# EAGLE board LIC_V-00237-01 (EAGLE 7.2.0)
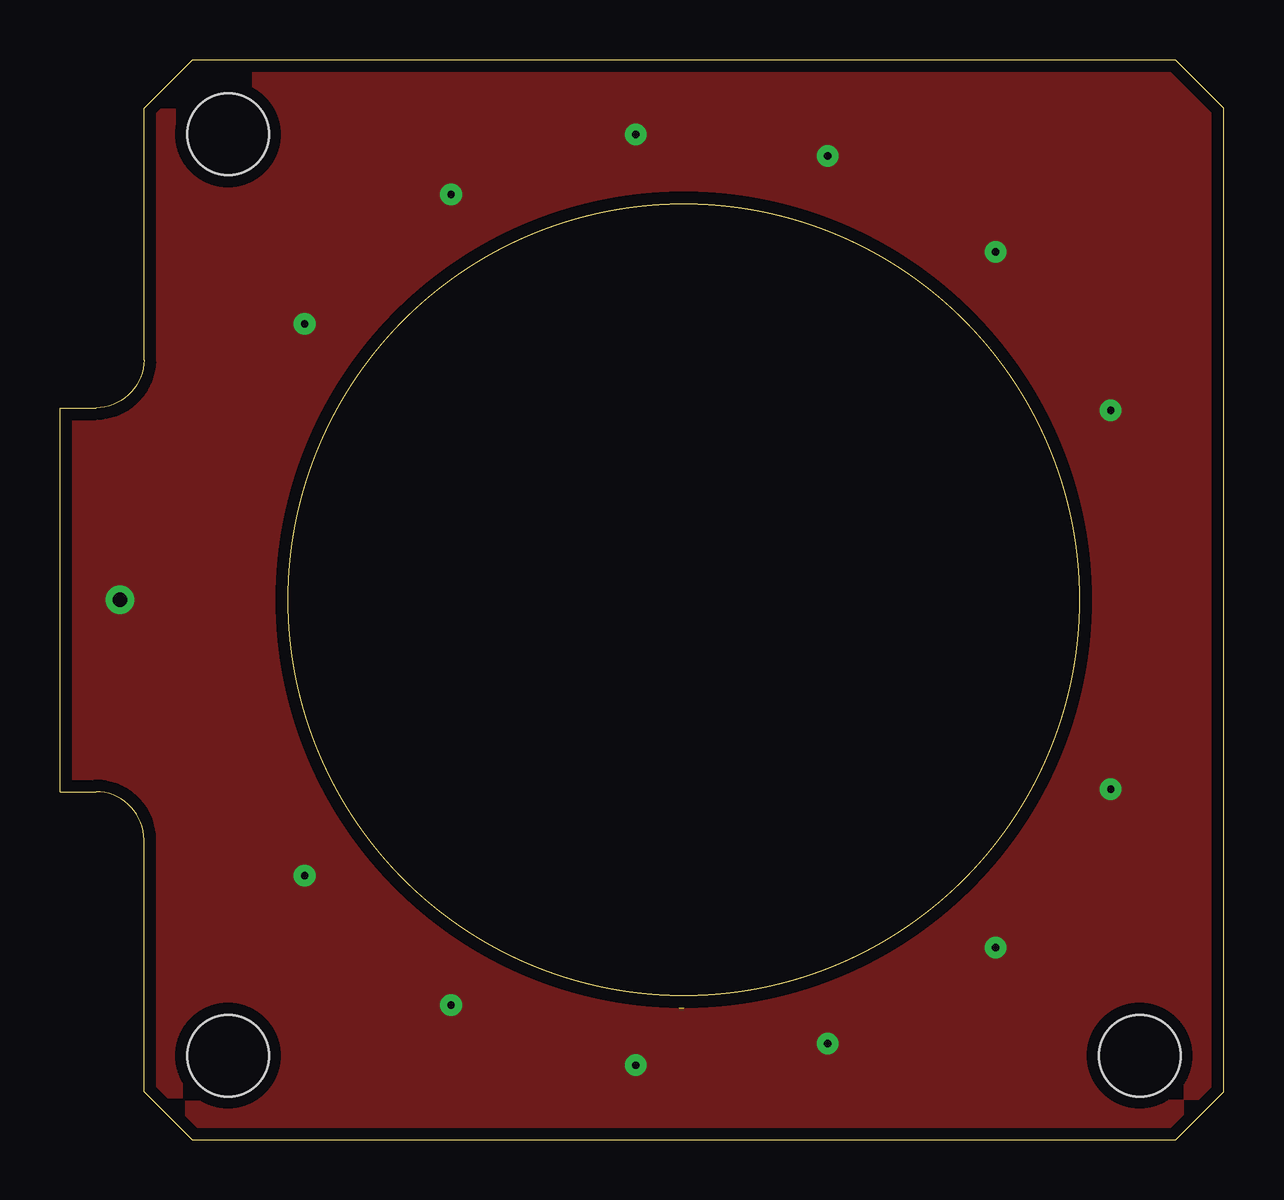
[diagram p0: board, top side]
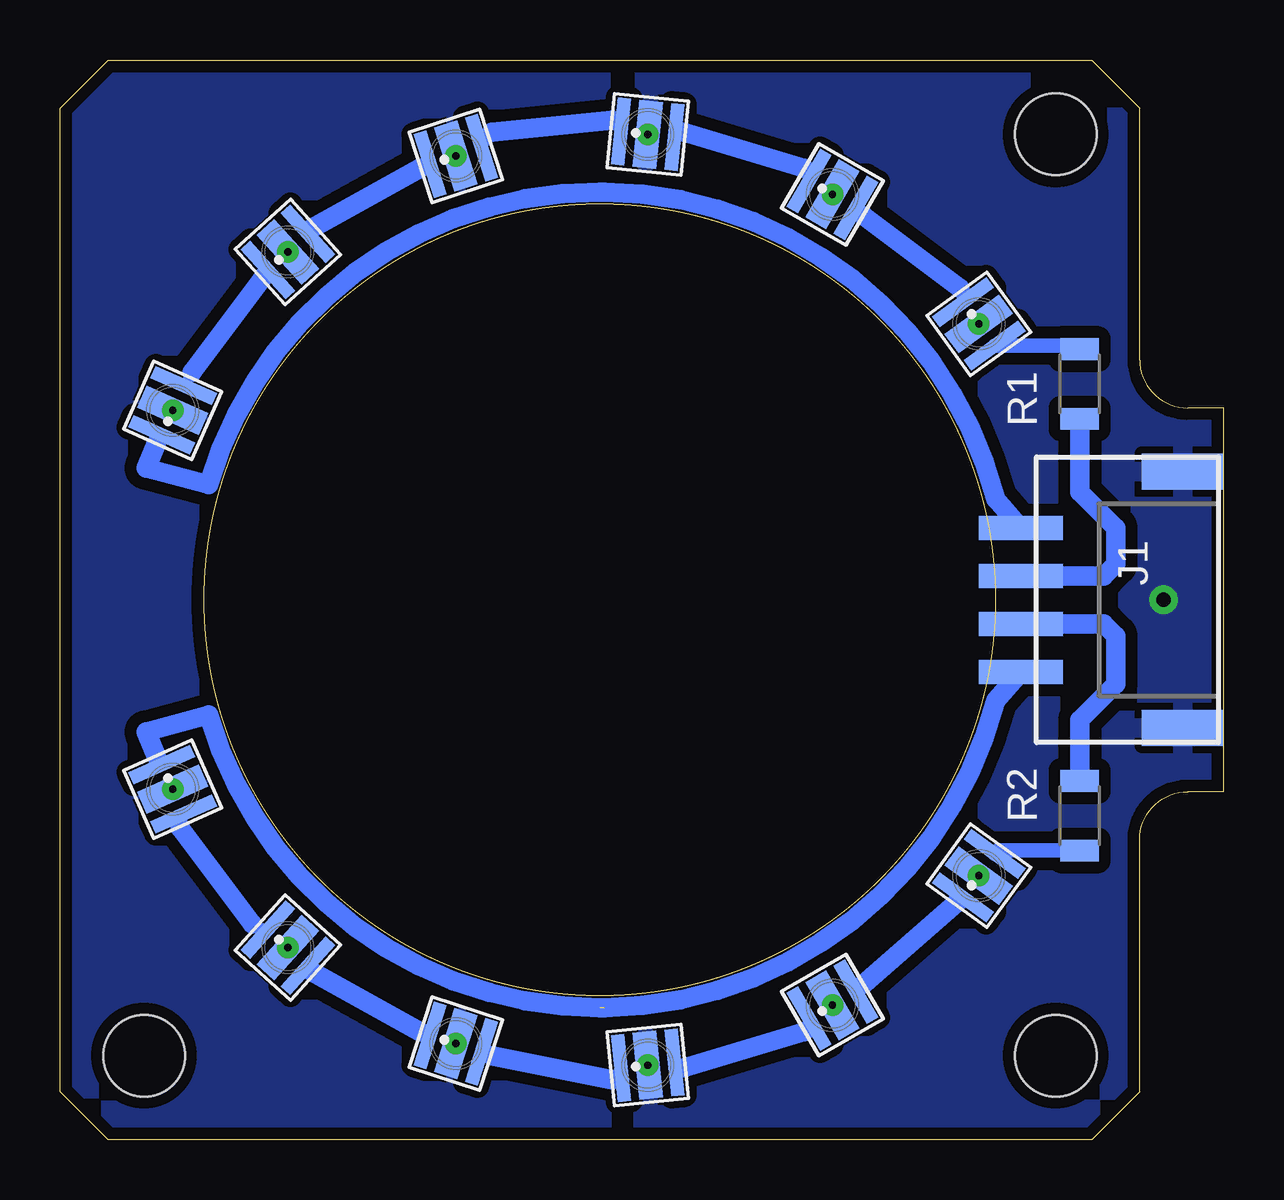
[diagram p1: board, bottom side, seen from below]

Size 48.5 x 45 mm. Coordinates in mm from the lower left corner, seen from the top.
Outline: 3.5,2 5.5,0 46.5,0 48.5,2 48.5,43 46.5,45 5.5,45 3.5,43 3.5,32.5 arc-90 1.5,30.5 0,30.5 0,14.5 1.5,14.5 arc-90 3.5,12.5 3.5,2
Outline: circle at 26,22.5 radius 16.5
Copper layers (1*16): Top 0.04mm / dielectric 1.5mm / Bottom 0.04mm
Design rules "mucha_navrh": minimum track width 0.2mm, minimum drill 0.6mm, track to track 0.5mm, track to pad 0.5mm, pad to pad 0.3mm, via to via 0.3mm, smd to smd 0mil, copper to edge 0.5mm, drill to drill 0.5mm, minimum pad ring 0.3mm, minimum via ring 0.3mm, stop-mask expansion 0.1mm, vias tented up to drill 0.8mm, thermal gap 0.3mm
Holes 3.4 mm at 7,3.5 45,3.5 7,41.9

## Footprints (pad centres in the part's own frame; a part is rotated, then mirrored left to right if it is on the bottom)
OSRAM_LCW = smd 0.55 x 2.8: A -1.125,0; C 1.125,0 | smd 1 x 2.8: THERMAL 0,0
S4B-PH-SM4-TB = smd 1 x 3.5: 1 3,-8.25; 2 1,-8.25; 3 -1,-8.25; 4 -3,-8.25 | smd 1.5 x 3.4: GND1 -5.35,-1.5; GND2 5.35,-1.5
R1206 = smd 0.9 x 1.6: 1 -1.45,0; 2 1.45,0

## Placement (x,y rotation side)
D1  OSRAM_LCW_CQ7P.EC-KTLP-5J7K-1-K  [OSRAM_LCW]  10.2,11 234 bottom
D2  OSRAM_LCW_CQ7P.EC-KTLP-5J7K-1-K  [OSRAM_LCW]  16.3,5.6 210 bottom
D3  OSRAM_LCW_CQ7P.EC-KTLP-5J7K-1-K  [OSRAM_LCW]  24,3.1 186 bottom
D4  OSRAM_LCW_CQ7P.EC-KTLP-5J7K-1-K  [OSRAM_LCW]  32,4 162 bottom
D5  OSRAM_LCW_CQ7P.EC-KTLP-5J7K-1-K  [OSRAM_LCW]  39,8 138 bottom
D6  OSRAM_LCW_CQ7P.EC-KTLP-5J7K-1-K  [OSRAM_LCW]  43.8,14.6 114 bottom
D8  OSRAM_LCW_CQ7P.EC-KTLP-5J7K-1-K  [OSRAM_LCW]  10.2,34 126 bottom
D9  OSRAM_LCW_CQ7P.EC-KTLP-5J7K-1-K  [OSRAM_LCW]  16.3,39.4 150 bottom
D10  OSRAM_LCW_CQ7P.EC-KTLP-5J7K-1-K  [OSRAM_LCW]  24,41.9 174 bottom
D11  OSRAM_LCW_CQ7P.EC-KTLP-5J7K-1-K  [OSRAM_LCW]  32,41 198 bottom
D12  OSRAM_LCW_CQ7P.EC-KTLP-5J7K-1-K  [OSRAM_LCW]  39,37 222 bottom
D13  OSRAM_LCW_CQ7P.EC-KTLP-5J7K-1-K  [OSRAM_LCW]  43.8,30.4 246 bottom
J1  S4B-PH-SM4-TB  [S4B-PH-SM4-TB]  0.2,22.5 270 bottom
R1  [R1206]  6,31.5 270 bottom
R2  [R1206]  6,13.5 90 bottom

## Library data of the parts
D1-D6 D8-D13 = led
J1 = con-jst
R1 R2 = rcl

## Nets
1+: J1.2 R2.2
1-: D6.C J1.1
2+: J1.3 R1.2
2-: D13.C J1.4
N$1: D1.C D2.A
N$2: D2.C D3.A
N$3: D3.C D4.A
N$4: D4.C D5.A
N$5: D5.C D6.A
N$6: D1.A R2.1
N$7: D8.C D9.A
N$8: D9.C D10.A
N$9: D10.C D11.A
N$10: D11.C D12.A
N$11: D8.A R1.1
N$14: D12.C D13.A
THERMAL: D1.THERMAL D2.THERMAL D3.THERMAL D4.THERMAL D5.THERMAL D6.THERMAL D8.THERMAL D9.THERMAL D10.THERMAL D11.THERMAL D12.THERMAL D13.THERMAL J1.GND1 J1.GND2

## Tracks (layer width: path | path; a pad name or v marks a point on that pad's centre or on a via)
1+
  Bottom 0.813: J1.2 5,21.5 4.5,21 4.5,19 6,17.5 R2.2
1-  (1 unrouted)
  Bottom 0.406: 44.5,16 D6.C
  Bottom 0.813: 26,5.5 arc74 42.3,17.7 44.9,17 44.5,16 | 25.8,5.5 arc-75 9.5,18.3 J1.1
2+
  Bottom 0.813: R1.2 6,27 4.5,25.5 4.5,24 5,23.5 J1.3
2-
  Bottom 0.406: D13.C 44.5,29
  Bottom 0.813: J1.4 9.5,26.7 arc-75 25.8,39.5 26,39.5 arc-74 42.3,27.3 44.9,28 44.5,29
N$1
  Bottom 0.406: D1.C 11,10 | 15,6.5 D2.A
  Bottom 0.813: 11,10 15,6.5
N$2
  Bottom 0.406: D3.A 22.5,3 | 17.5,4.5 D2.C
  Bottom 0.813: 22.5,3 17.5,4.5
N$3
  Bottom 0.406: D4.A 30.5,3.5 | 25.5,2.5 D3.C
  Bottom 0.813: 30.5,3.5 25.5,2.5
N$4
  Bottom 0.406: D5.A 38,7 | 33.5,4.5 D4.C
  Bottom 0.813: 38,7 33.5,4.5
N$5
  Bottom 0.406: D6.A 43.5,13 | 40.5,9 D5.C
  Bottom 0.813: 43.5,13 40.5,9
N$6
  Bottom 0.61: R2.1 9.4,12.05 D1.A
N$7
  Bottom 0.406: D9.A 15,38.5 | D8.C 11,35.5
  Bottom 0.813: 15,38.5 11,35.5
N$8
  Bottom 0.406: D9.C 17.5,40.5 | D10.A 22.5,42
  Bottom 0.813: 22.5,42 17.5,40.5
N$9
  Bottom 0.406: D10.C 25.5,42.5 | D11.A 30.5,42
  Bottom 0.813: 25.5,42.5 30.5,42
N$10
  Bottom 0.406: D11.C 33.5,40.5 | 38,38 D12.A
  Bottom 0.813: 33.5,40.5 38,38
N$11
  Bottom 0.61: D8.A 6.14,33.09 R1.1
N$14
  Bottom 0.406: D13.A 43,32 | D12.C 40,36
  Bottom 0.813: 40,36 43,32
THERMAL  (via drill 0.3, 0.6)
  other vias: 24,41.9 32,41 16.3,39.4 16.3,5.6 10.2,11 24,3.1 32,4 39,8 43.8,14.6 43.8,30.4 39,37 10.2,34 2.5,22.5
  pour Bottom (rank 5): 0,0 48.5,0 48.5,45 0,45
  pour Top: 0,0 48.5,0 48.5,45 0,45